# Altium PCB MRIAMP.PcbDoc (part 1 of 2)
Units mm, origin at the board's own origin, x right, y up, seen from the top; angles counter-clockwise.
Board outline 150.25 x 132.25 mm, 4 copper layers (Top Layer, Signal Layer 1, Signal Layer 2, Bottom Layer), stack 0.971 mm thick; 235 components, 124 nets, 584 pads, 101 vias.
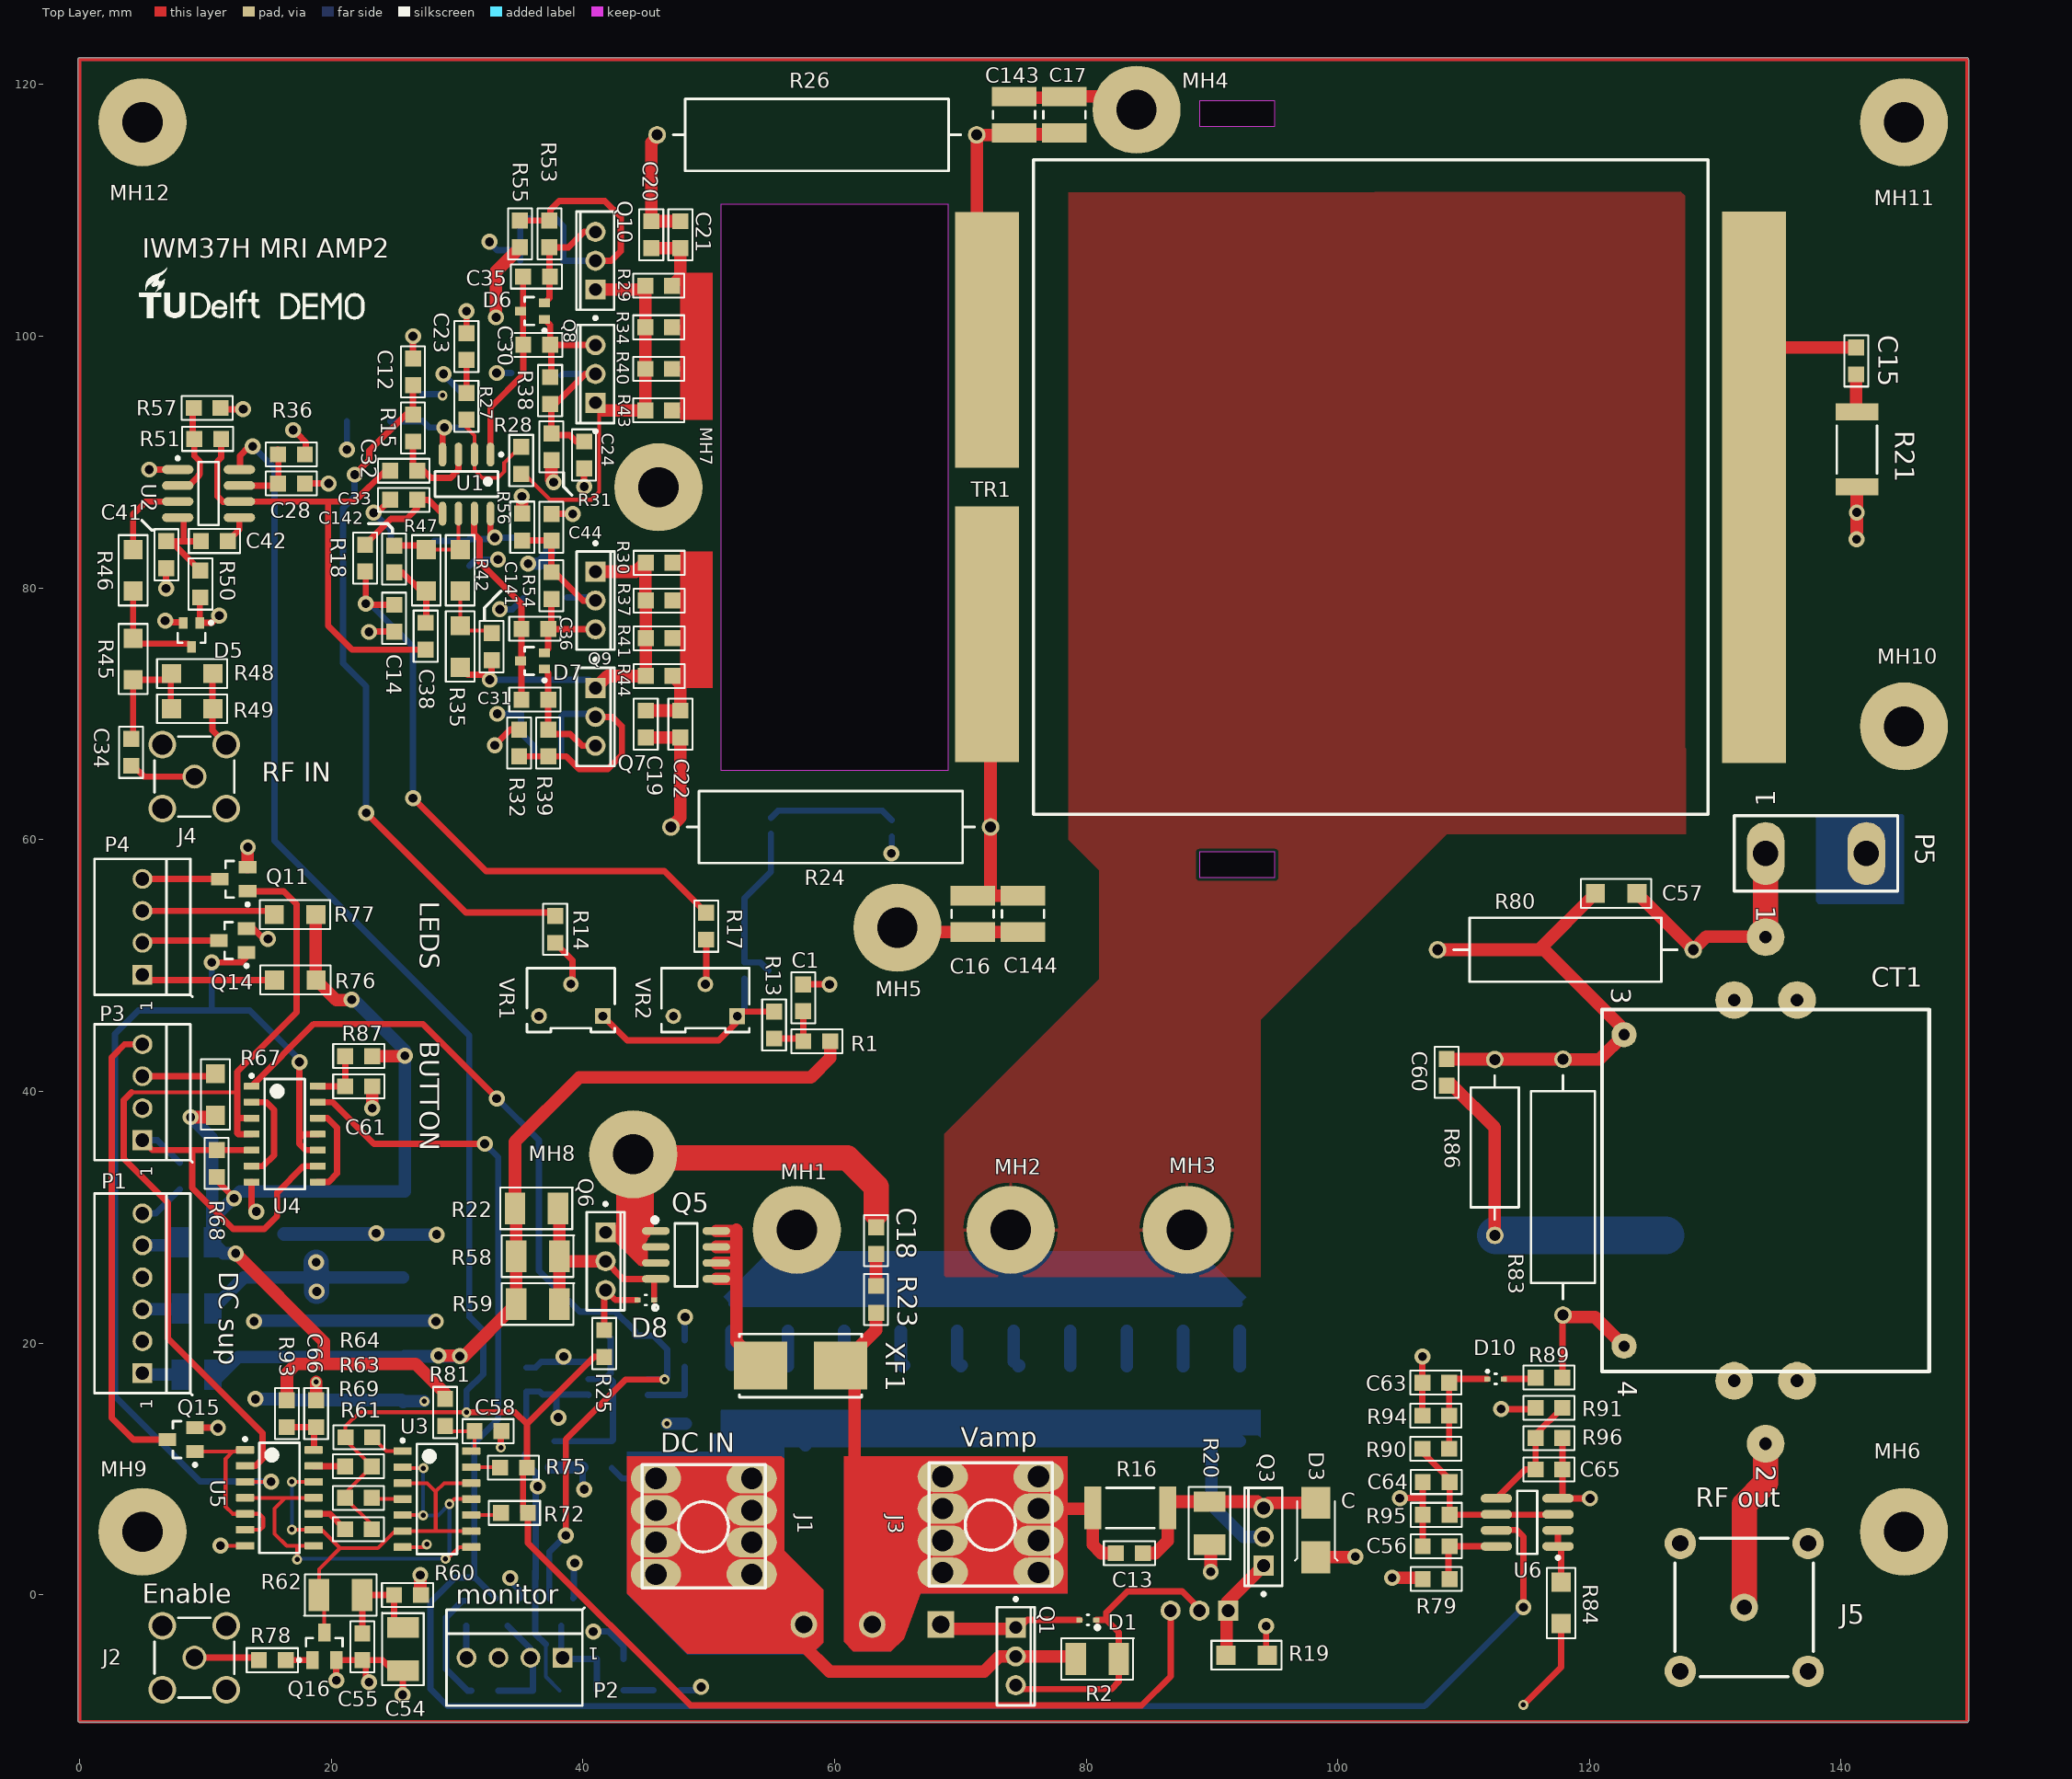
[diagram p0: Top Layer view]
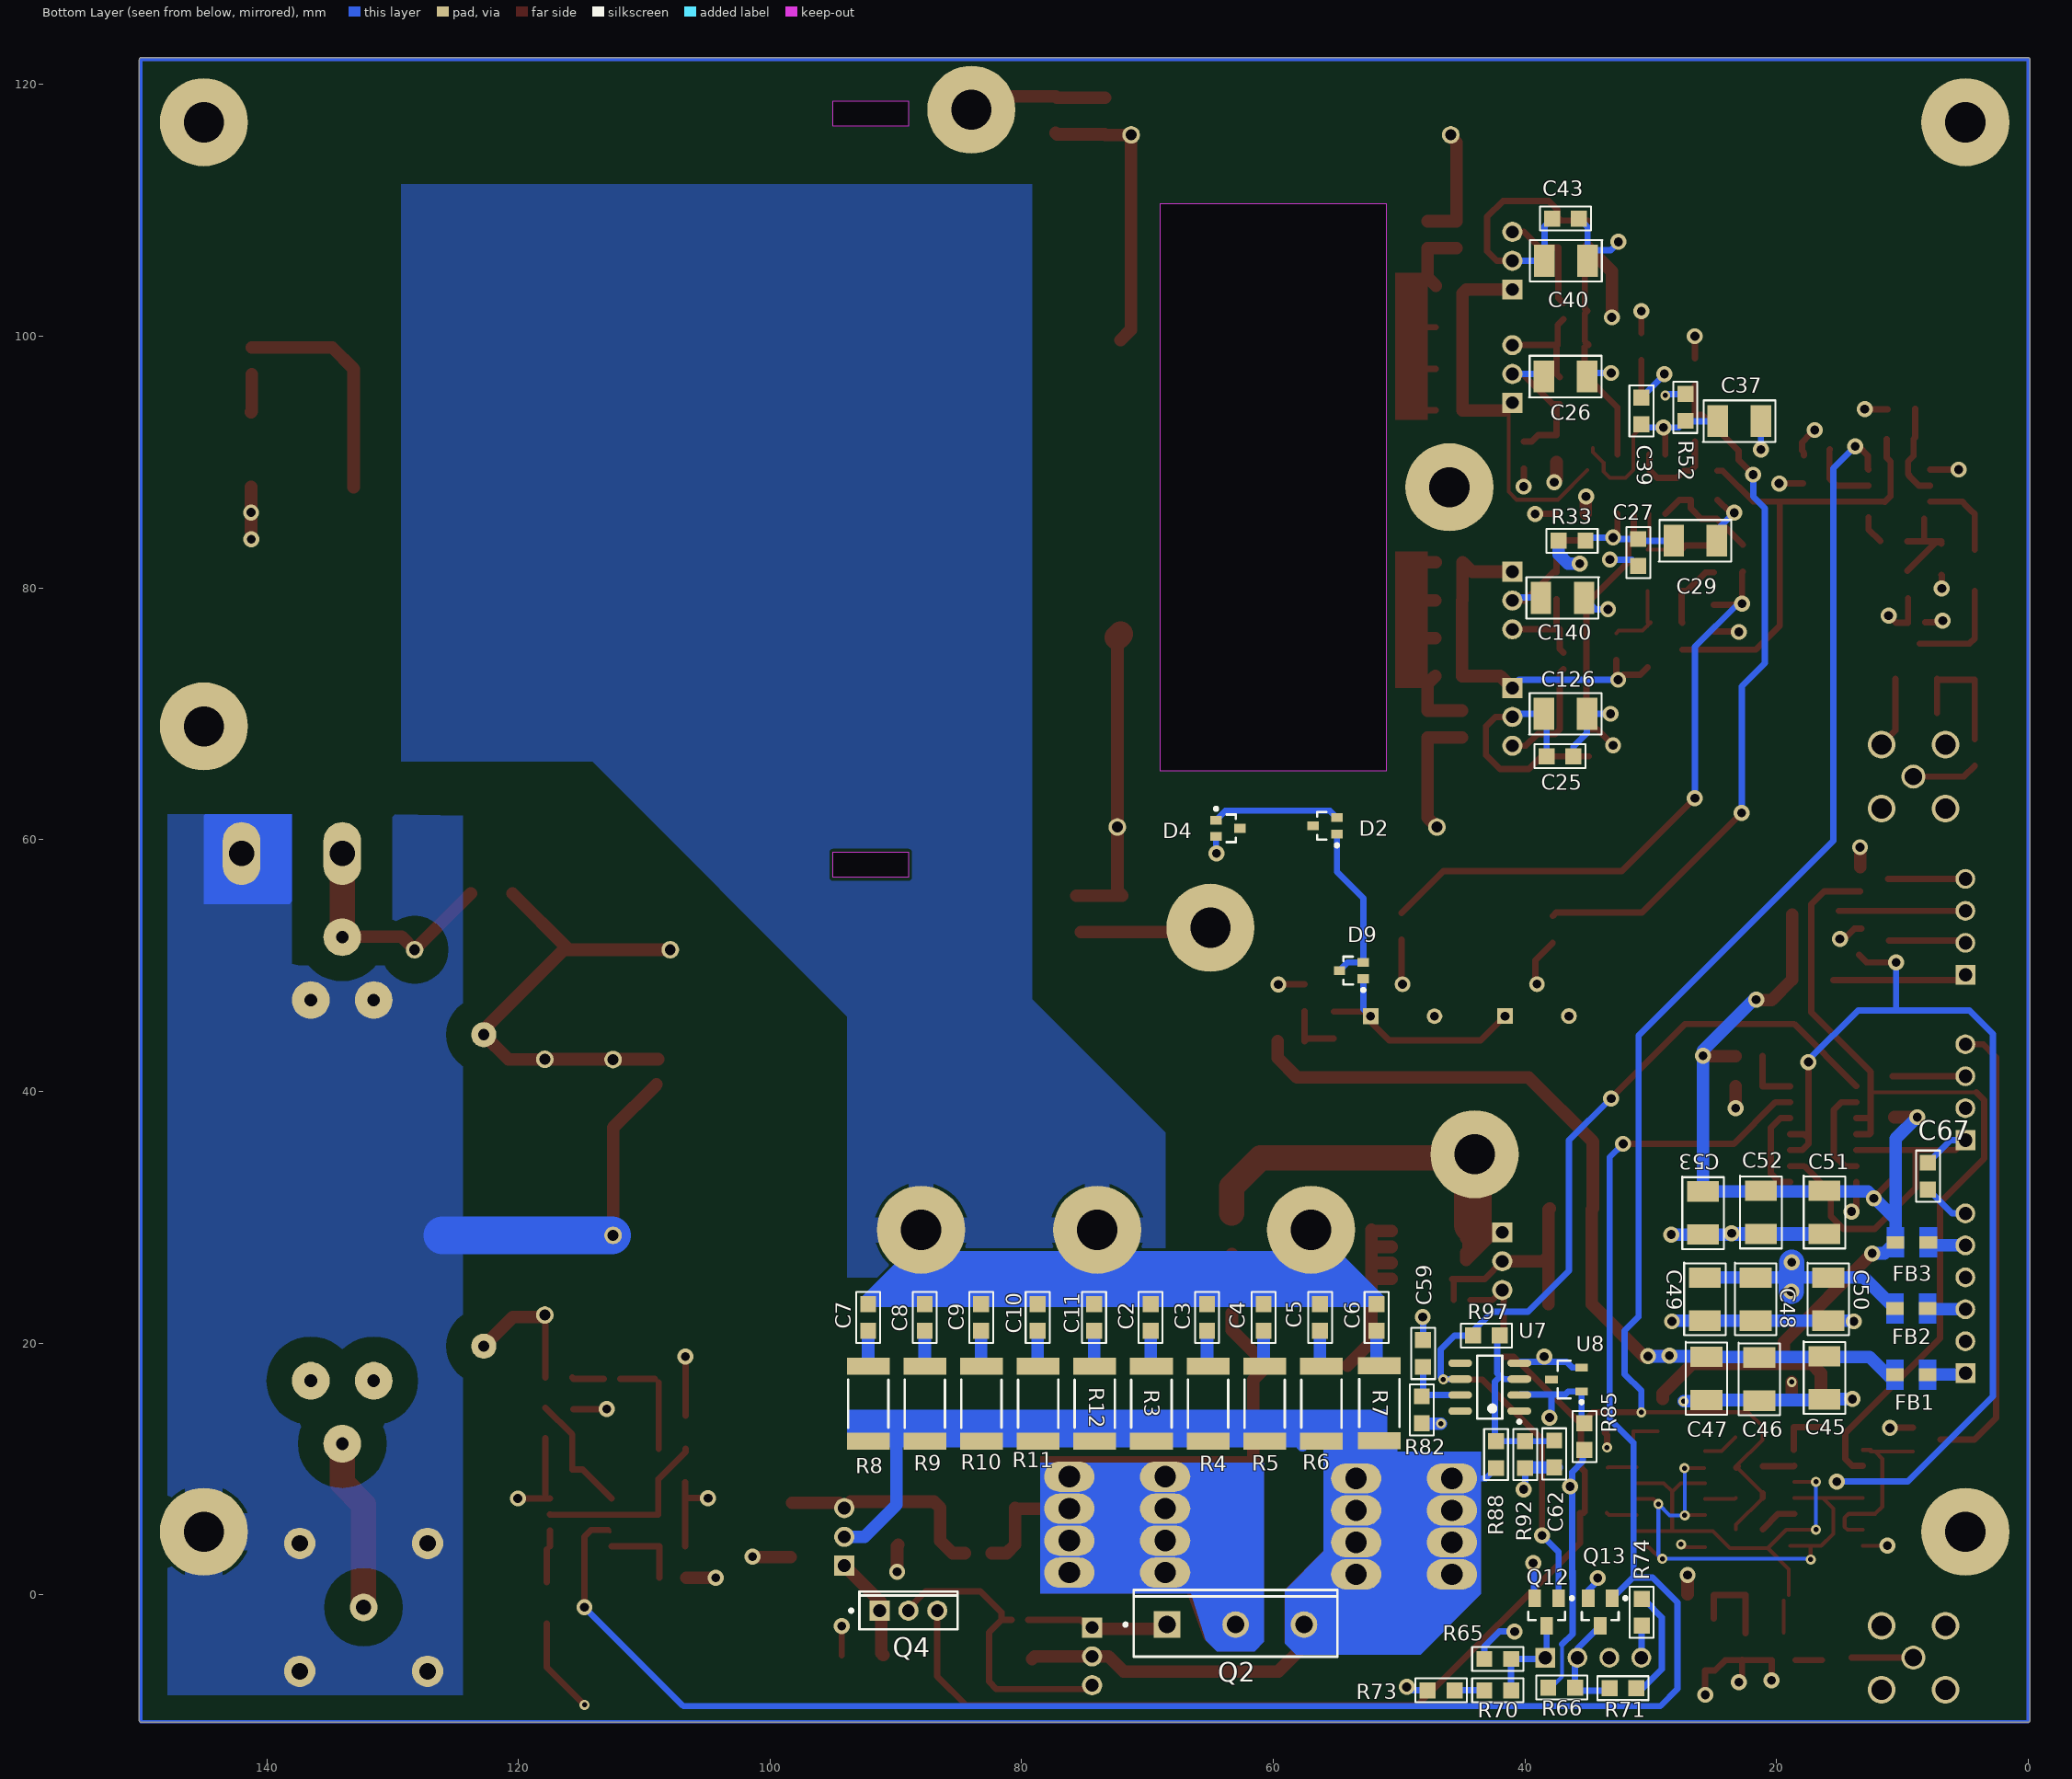
[diagram p1: Bottom Layer view, seen from below]
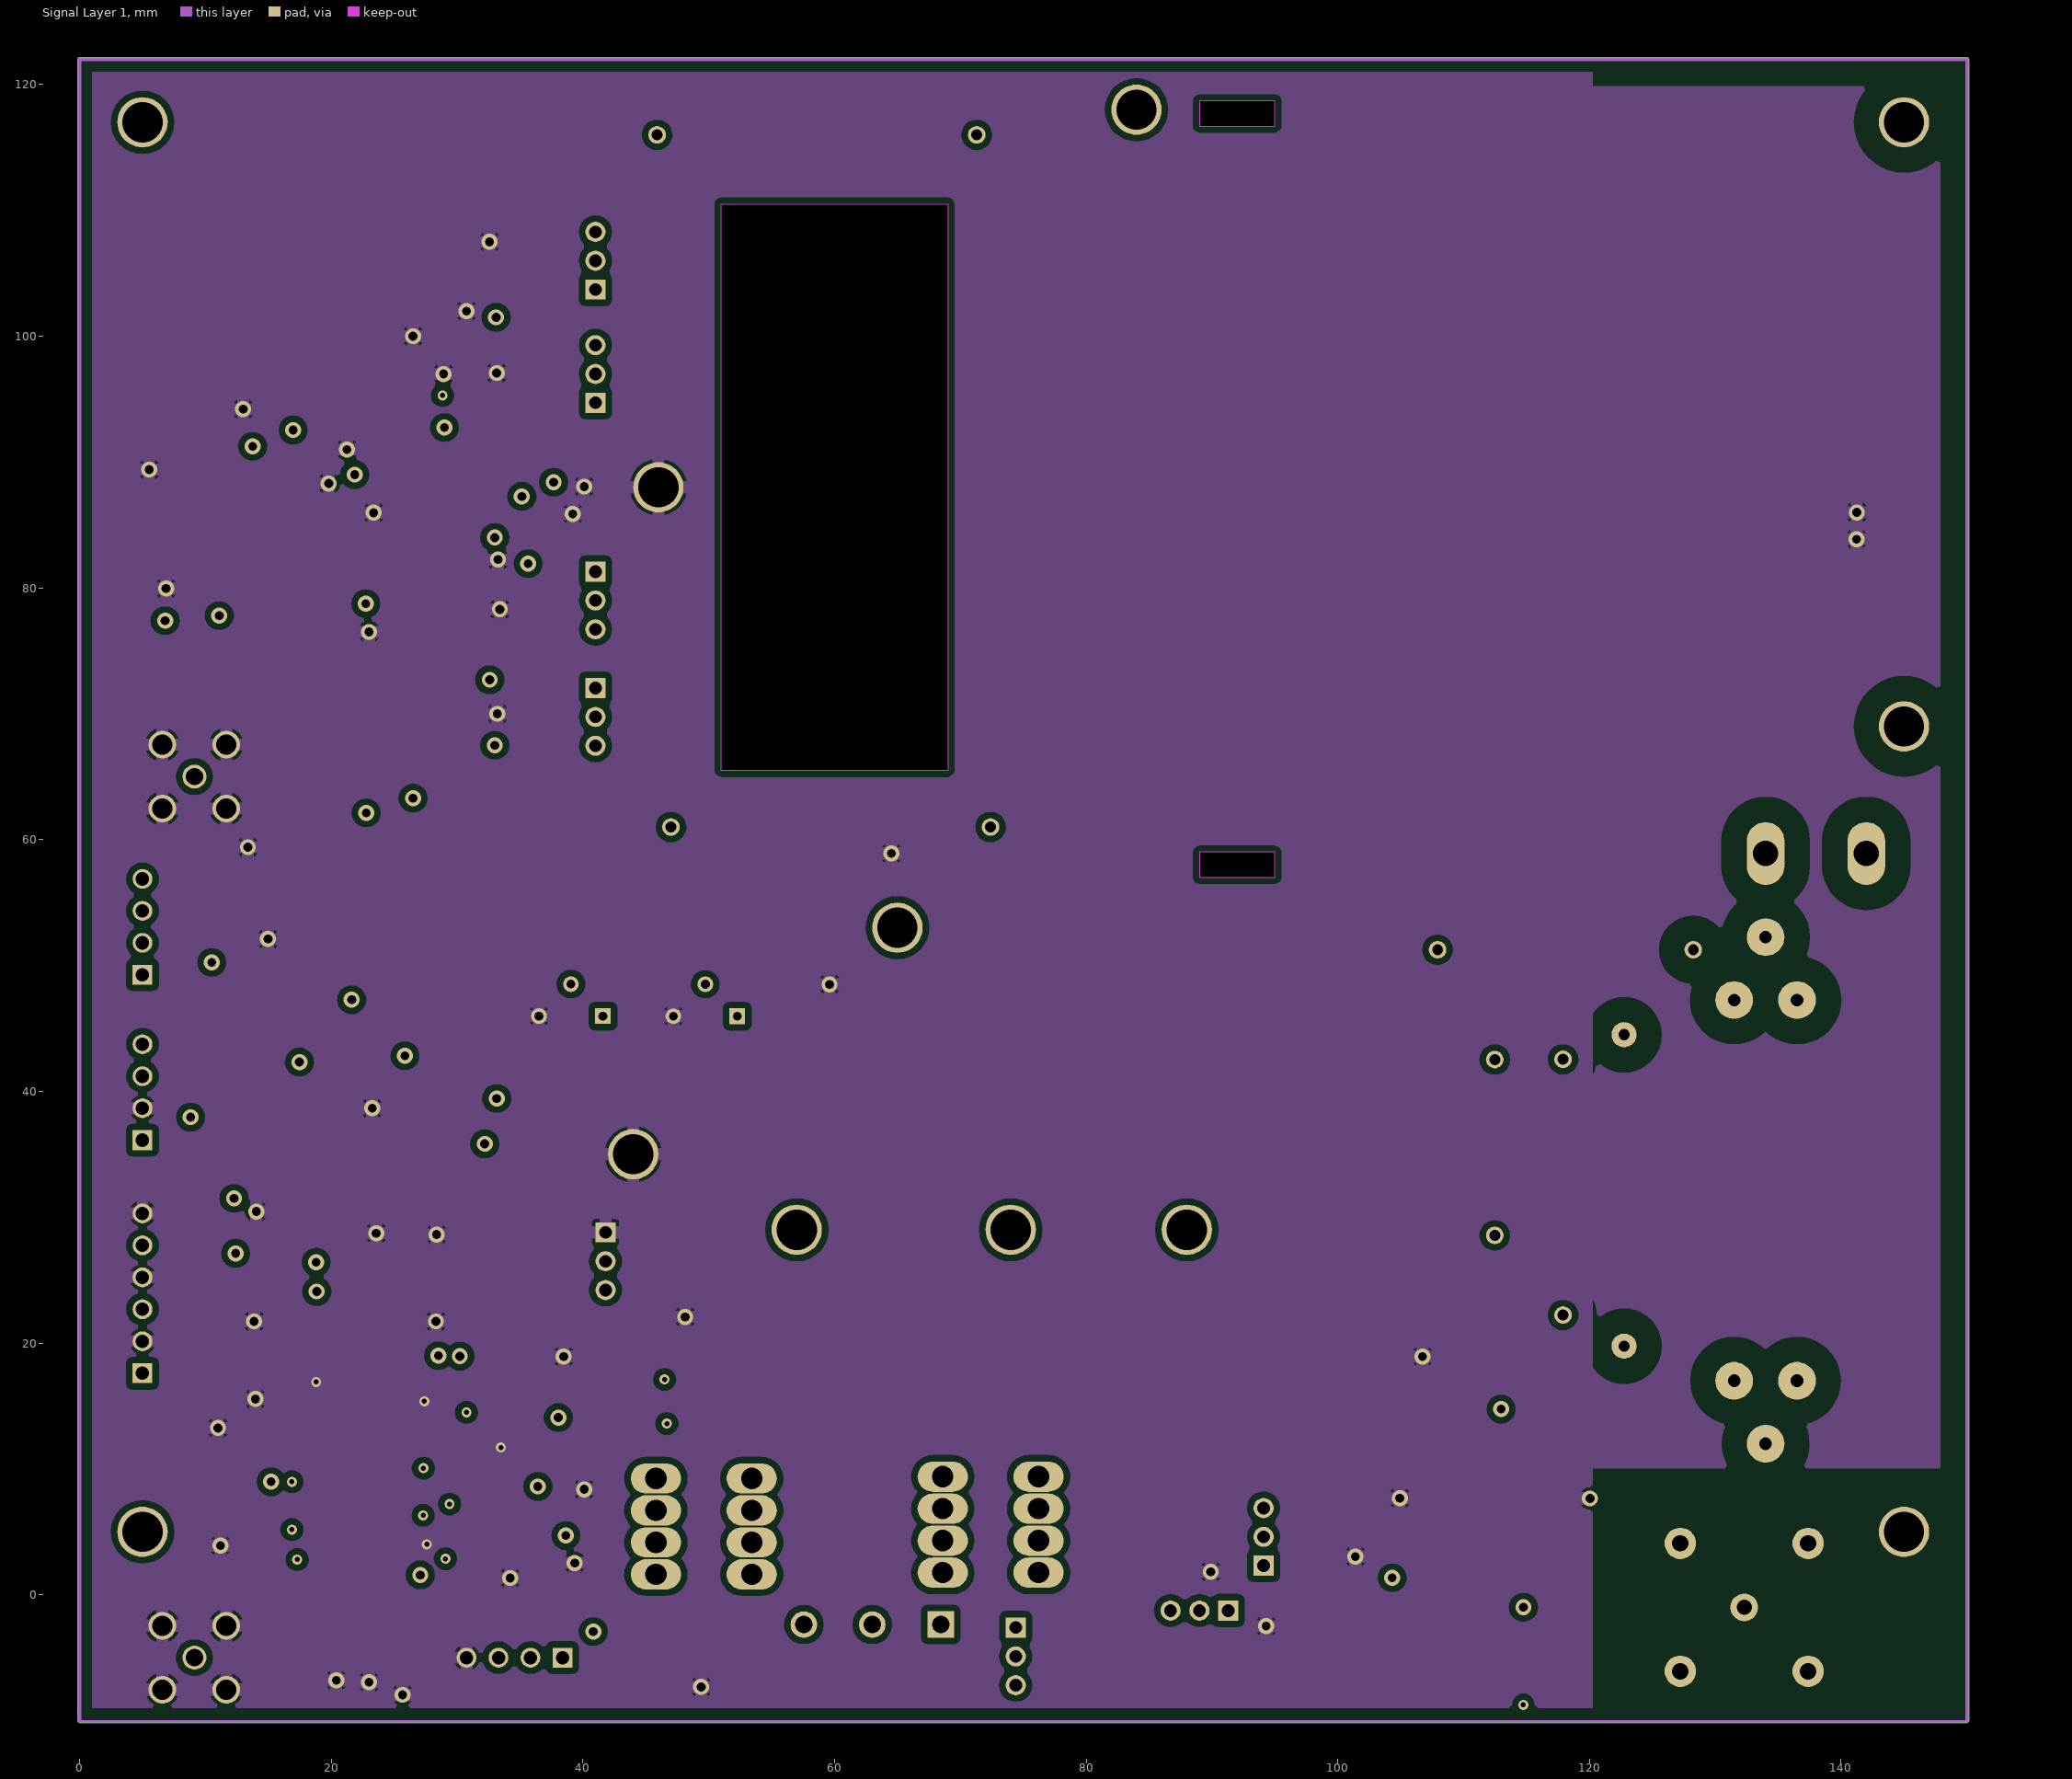
[diagram p2: Signal Layer 1]
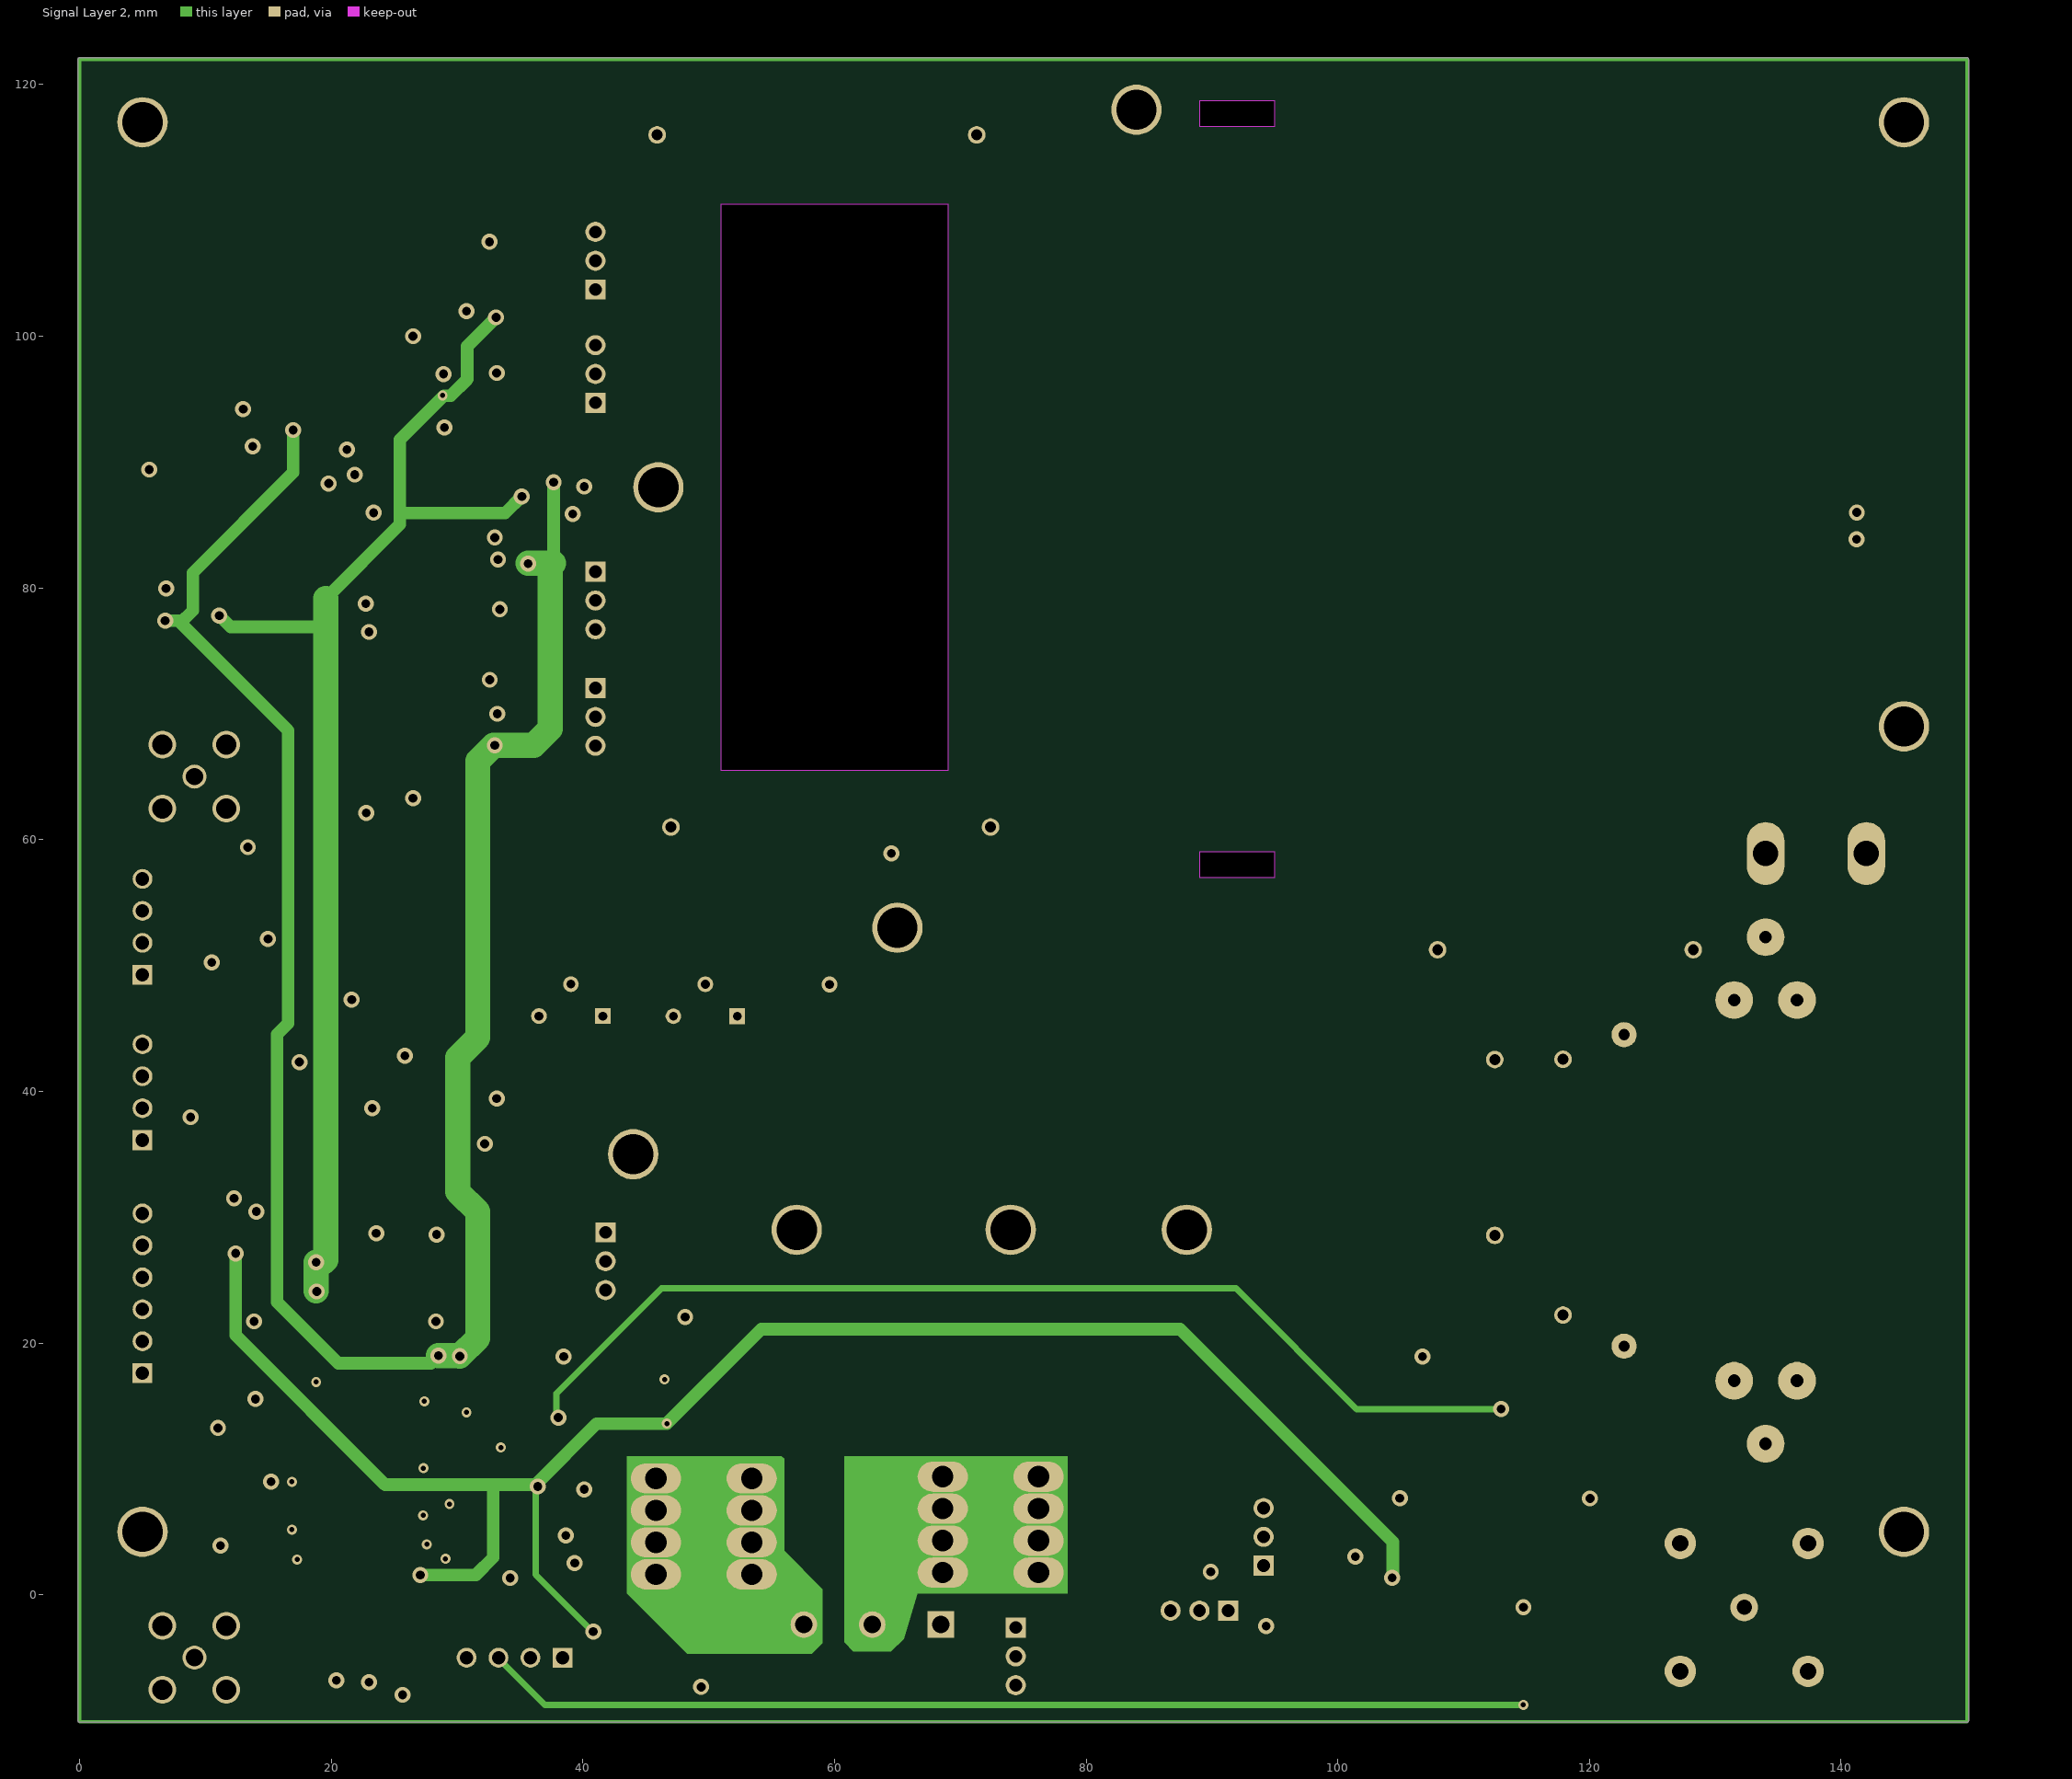
[diagram p3: Signal Layer 2]

## Layer stack, top to bottom
Top Solder: solder mask 0.0102, Solder Resist, Dk 3.5
Top Layer: signal copper 0.0356
Dielectric 1: dielectric 0.32, FR-4, Dk 4.8
Signal Layer 1: signal copper 0.036
Dielectric 2: dielectric 0.254, Dk 4.2
Signal Layer 2: signal copper 0.036
Dielectric 3: dielectric 0.254, Dk 4.2
Bottom Layer: signal copper 0.0356
Bottom Solder: solder mask 0.0102, Solder Resist, Dk 3.5

## Board outline
-0.127,-10 ccw(c0,-10) 0,-10.127 150,-10.127 ccw(c150,-10) 150.127,-10 150.127,122 ccw(c150,122) 150,122.127 0,122.127 ccw(c0,122) -0.127,122
cut-out: 51,110.5 69,110.5 69,65.5 51,65.5
cut-out: 89,116.7 95,116.7 95,118.7 89,118.7
cut-out: 89,57 95,57 95,59 89,59

## Design rules (kind name [scope] priority, off if disabled: settings)
Clearance Clearance_4 [InNamedPolygon('GND')] p1: gap=0.5 ignorepadtopadclearanceinfootprint=FALSE except(0: Arc-Hole Track-Hole SMDPad-Hole THPad-Hole Via-Hole Fill-Hole Poly-Hole Region-Hole Text-Hole)
Clearance Clearance_3 [InNamedPolygon('GND2')] p2: gap=2 ignorepadtopadclearanceinfootprint=FALSE except(0: Arc-Hole Track-Hole SMDPad-Hole THPad-Hole Via-Hole Fill-Hole Poly-Hole Region-Hole Text-Hole)
Clearance Clearance_2 [InNamedPolygon('GND2')] p3: gap=0.4 ignorepadtopadclearanceinfootprint=FALSE except(0: Arc-Hole Track-Hole SMDPad-Hole THPad-Hole Via-Hole Fill-Hole Poly-Hole Region-Hole Text-Hole)
Clearance Clearance_1 [InNamedPolygon('RFGND_L04_P010')] p4: gap=2 ignorepadtopadclearanceinfootprint=FALSE except(0: Arc-Hole Track-Hole SMDPad-Hole THPad-Hole Via-Hole Fill-Hole Poly-Hole Region-Hole Text-Hole)
Clearance [All] p5: gap=0.254 ignorepadtopadclearanceinfootprint=FALSE except(0: Arc-Hole Track-Hole SMDPad-Hole THPad-Hole Via-Hole Fill-Hole Poly-Hole Region-Hole Text-Hole)
Height [All] p1: minheight=0 maxheight=26 prefheight=12.7
HoleSize [All] p1: absolutevalues=TRUE maxlimit=6 minlimit=0.35 maxpercent=80.000 minpercent=20.000
MinimumAnnularRing [All] p1: minimumring=0.2
PlaneClearance [All] p1: clearance=1
PolygonConnect PolygonConnect_5 [All vs IsNamedPolygon('bot Layer- shield')] p1: connectstyle=Relief reliefconductorwidth=0.254 reliefentries=4 polygonreliefangle="45 Angle" airgapwidth=0.254
PolygonConnect PolygonConnect_4 [All vs IsNamedPolygon('GND')] p2: connectstyle=Relief reliefconductorwidth=1 reliefentries=4 polygonreliefangle="90 Angle" airgapwidth=0.254
PolygonConnect PolygonConnect_3 [All vs IsNamedPolygon('GND2')] p3: connectstyle=Relief reliefconductorwidth=1 reliefentries=4 polygonreliefangle="90 Angle" airgapwidth=0.254
PolygonConnect PolygonConnect_2 [All vs IsNamedPolygon('RFGND_L04_P010')] p4: connectstyle=Relief reliefconductorwidth=3 reliefentries=4 polygonreliefangle="90 Angle" airgapwidth=0.254
PolygonConnect PolygonConnect_1 [All vs IsNamedPolygon('RFGND_L04_P010')] p5: connectstyle=Relief reliefconductorwidth=1 reliefentries=4 polygonreliefangle="90 Angle" airgapwidth=0.254
PolygonConnect [All] p6: connectstyle=Relief reliefconductorwidth=0.254 reliefentries=4 polygonreliefangle="90 Angle" airgapwidth=0.254
RoutingVias [All] p1: holewidth=0.4 width=0.8 viastyle="Through Hole" minholewidth=0.4 minwidth=0.8 maxholewidth=0.711 maxwidth=1.27
SolderMaskExpansion [All] p1: expansion=0.102
Width [All] p1: maxlimit=3 minlimit=0.254 preferedwidth=0.3 minimp=50.000000 maximp=50.000000 favimp=50.000000
27 further rules are at their usual default settings.

## Classes and differential pairs
component class monitoring: C54 C55 C56 C57 C58 C59 C60 C61 C62 C63 C64 C65 C66 C67 CT1 D10 J2 J5 MH6 P2 P3 P4 P5 Q11 Q12 Q13 Q14 Q15 Q16 R60 R61 R62 R63 R64 R65 R66 R67 R68 R69 R70 R71 R72 R73 R74 R75 R76 R77 R78 R79 R80 R81 R82 R83 R84 R85 R86 R87 R88 R89 R90 R91 R92 R93 R94 R95 R96 R97 U3 U4 U5 U6 U7 U8
component class MRIAMP: C1 C2 C3 C4 C5 C6 C7 C8 C9 C10 C11 C12 C13 C14 C15 C16 C17 C18 C19 C20 C21 C22 C23 C24 C25 C26 C27 C28 C29 C30 C31 C32 C33 C34 C35 C36 C37 C38 C39 C40 C41 C42 C43 C44 C45 C46 C47 C48 C49 C50 C51 C52 C53 C126 C140 C141 C142 C143 C144 D1 D2 D3 D4 D5 D6 D7 D8 D9 FB1 FB2 FB3 J1 J3 J4 MH1 MH2 MH3 MH4 MH5 MH7 MH8 MH9 MH11 MH12 P1 Q1 Q2 Q3 Q4 Q5 Q6 Q7 Q8 Q9 Q10 R1 R2 R3 R4 R5 R6 R7 R8 R9 R10 R11 R12 R13 R14 R15 R16 R17 R18 R19 R20 R21 R22 R23 R24 R25 R26 R27 R28 R29 R30 R31 R32 R33 R34 R35 R36 R37 R38 R39 R40 R41 R42 R43 R44 R45 R46 R47 R48 R49 R50 R51 R52 R53 R54 R55 R56 R57 R58 R59 TR1 U1 U2 VR1 VR2 XF1

## Components (designator, comment, footprint, x,y, rotation, side; value= is the part's Value field where it differs from the comment)
C1 "Cap" SM/C_0805 57.512,48.5 r270 top
C2 "Cap" SM/C_0805 69.756,23.1 r270 bottom
C3 "Cap" SM/C_0805 65.267,23.1 r270 bottom
C4 "Cap" SM/C_0805 60.778,23.1 r270 bottom
C5 "Cap" SM/C_0805 56.289,23.1 r270 bottom
C6 "Cap" SM/C_0805 51.8,23.1 r270 bottom
C7 "Cap" SM/C_0805 92.2,23.1 r270 bottom
C8 "Cap" SM/C_0805 87.711,23.1 r270 bottom
C9 "Cap" SM/C_0805 83.222,23.1 r270 bottom
C10 "Cap" SM/C_0805 78.733,23.1 r270 bottom
C11 "Cap" SM/C_0805 74.244,23.1 r270 bottom
C12 "Cap" SM/C_0805 26.5,98.24 r270 top
C13 "Cap" SM/C_0805 84.5,3.3 r180 top
C14 "Cap" SM/C_0805 25,76.529 r90 top
C15 "Cap" SM/C_0805 141.2,99.1 r270 top
C16 "Cap" SMD/C_1111 70.975,54.1 r90 top
C17 "Cap" SMD/C_1111 78.27,117.6 r270 top
C18 "Cap" SM/C_0805 63.3,29.2 r270 top
C19 "Cap" SM/C_0805 45,70.25 r270 top
C20 "Cap" SM/C_0805 45.438,107 r90 top
C21 "Cap" SM/C_0805 47.75,107 r90 top
C22 "Cap" SM/C_0805 47.75,70.25 r270 top
C23 "Cap" SM/C_0805 30.75,100.25 r270 top
C24 "Cap" SM/C_0805 40.1,89.5 r90 top
C25 "Cap" SM/C_0805 36.15,66.625 r0 bottom
C26 "Cap" SM/C_1210 38.5,96.8 r180 bottom
C27 "Cap" SM/C_0805 31,81.75 r90 bottom
C28 "Cap" SM/C_0805 17.904,88.3 r180 top
C29 "Cap" SM/C_1210 28.179,83.75 r180 bottom
C30 "Cap" SM/C_0805 37.4,99.314 r180 top
C31 "Cap" SM/C_0805 37.25,71.12 r180 top
C32 "Cap" SM/C_0805 26.829,89.312 r180 top
C33 "Cap" SM/C_0805 26.829,87 r180 top
C34 "Cap" SM/C_0805 4.1,68 r270 top
C35 "Cap" SM/C_0805 37.384,104.737 r180 top
C36 "Cap" SM/C_0805 37.25,76.75 r180 top
C37 "Cap" SM/C_1210 24.679,93.25 r180 bottom
C38 "Cap" SM/C_0805 27.5,75.102 r90 top
C39 "Cap" SM/C_0805 30.75,93 r90 bottom
C40 "Cap" SM/C_1210 35.025,106 r0 bottom
C41 "Cap" SM/C_0805 6.9,81.575 r90 top
C42 "Cap" SM/C_0805 11.775,83.725 r180 top
C43 "Cap" SM/C_0805 37.85,109.35 r180 bottom
C44 "Cap" SM/C_0805 37.5,83.75 r90 top
C45 "Cap" SM/C_1210 16.2,18.95 r270 bottom
C46 "Cap" SM/C_1210 21.375,18.85 r270 bottom
C47 "Cap" SM/C_1210 25.575,18.9 r270 bottom
C48 "Cap" SM/C_1210 21.675,25.2 r270 bottom
C49 "Cap" SM/C_1210 25.7,25.2 r270 bottom
C50 "Cap" SM/C_1210 15.9,25.2 r270 bottom
C51 "Cap" SM/C_1210 16.2,32.1 r270 bottom
C52 "Cap" SM/C_1210 21.25,32.1 r270 bottom
C53 "Cap" SM/C_1210 25.85,32.05 r270 bottom
C54 "Cap" SM/C_1210 25.7,-2.6 r270 top
C55 "Cap" SM/C_0805 22.475,-5.2 r90 top
C56 "Cap" SM/C_0805 106.75,3.85 r0 top
C57 "Cap" SM/C_1206 120.475,55.725 r0 top
C58 "Cap" SM/C_0805 33.525,13 r180 top
C59 "Cap" SM/C_0805 48.1,20.234 r270 bottom
C60 "Cap" SM/C_0805 108.65,40.45 r90 top
C61 "Cap" SM/C_0805 23.25,40.4 r180 top
C62 "Cap" SM/C_0805 37.675,10.125 r90 bottom
C63 "Cap" SM/C_0805 106.716,16.85 r0 top
C64 "Cap" SM/C_0805 106.75,8.95 r0 top
C65 "Cap" SM/C_0805 117.85,9.95 r180 top
C66 "Cap" SM/C_0805 18.8,15.45 r270 top
C67 "Cap" SM/C_0805 7.975,32.2 r90 bottom
C126 "Cap" SM/C_1210 38.5,70 r180 bottom
C140 "Cap" SM/C_1210 35.3,79.2 r0 bottom
C141 "Cap" SM/C_0805 32.752,74.266 r90 top
C142 "Cap" SM/C_0805 25,83.367 r270 top
C143 "Cap" SMD/C_1111 74.262,117.6 r270 top
C144 "Cap" SMD/C_1111 74.983,54.1 r90 top
CT1 "CT1:10" CT 134,32 r180 top
D1 "BAT54XV2T5G" ONSC-SOD-523-2-502-01_V 80.14,-2 r180 top
D2 "BAV99WT1G" ONSC-SOT-323-3-419-04_V 55.9,61.1 r0 bottom
D3 "ES1C" SM/DO214AC_12 98.255,2.982 r90 top
D4 "BAV99WT1G" ONSC-SOT-323-3-419-04_V 63.6,60.9 r180 bottom
D5 "BAV99WT1G" ONSC-SOT-323-3-419-04_V 8.9,76.275 r270 top
D6 "BAV99WT1G" ONSC-SOT-323-3-419-04_V 36,102 r180 top
D7 "BAV99WT1G" ONSC-SOT-323-3-419-04_V 36,74.203 r180 top
D8 "BAT54XV2T5G" ONSC-SOD-523-2-502-01_V 45,23.421 r180 top
D9 "BAV99WT1G" ONSC-SOT-323-3-419-04_V 53.8,49.6 r0 bottom
D10 "BAT54XV2T5G" ONSC-SOD-523-2-502-01_V 112.55,17.15 r0 top
FB1 "BLM21PG300SN1B" MURA-BLM21-B40-CHIP-2_V1 9.3,17.475 r0 bottom
FB2 "BLM21PG300SN1B" MURA-BLM21-B40-CHIP-2_V1 9.3,22.75 r0 bottom
FB3 "BLM21PG300SN1B" MURA-BLM21-B40-CHIP-2_V1 9.25,28 r0 bottom
"IWM37H MRI AMP2" "Comment" LOGO3 4.75,101.275 r0 top
J1 "M4 bushing" BUSHING_M4 45.8,9.24 r0 top
J2 "CONSMA008" SMA-Grotere-Gaten 9.127,-5 r90 top
J3 "M4 bushing" BUSHING_M4 68.6,9.38 r0 top
J4 "CONSMA008" SMA-Grotere-Gaten 9.127,65.011 r0 top
J5 "R141426161" BNC_Danny 132.3,-1 r180 top
MH1 "M3spacer" MTHOLE3.2MM_TOPBOT7MM#1 57.1,31.1 r0 top
MH2 "M3spacer" MTHOLE3.2MM_TOPBOT7MM#2 73.257,30.9 r0 top
MH3 "M3spacer" MTHOLE3.2MM_TOPBOT7MM#3 88.9,30.9 r0 top
MH4 "M3spacer" MTHOLE3.2MM_TOPBOT7MM#4 83.693,117.983 r0 top
MH5 "M3spacer" MTHOLE3.2MM_TOPBOT7MM#5 65,53 r90 top
MH6 "M3spacer" MTHOLE3.2MM_TOPBOT7MM#6 144.606,-0.548 r90 top
MH7 "M3spacer" MTHOLE3.2MM_TOPBOT7MM#5 46,88 r0 top
MH8 "M3spacer" MTHOLE3.2MM_TOPBOT7MM#7 44.6,38.656 r90 top
MH9 "M3spacer" MTHOLE3.2MM_TOPBOT7MM#5 5,5 r90 top
MH10 "M3spacer" MTHOLE3.2MM_TOPBOT7MM#8 155.734,-4.949 r90 top
MH11 "M3spacer" MTHOLE3.2MM_TOPBOT7MM#5 145,117 r90 top
MH12 "M3spacer" MTHOLE3.2MM_TOPBOT7MM#5 5,117 r90 top
P1 "Header 6" POLCON.100/VH/TM1SQS/W.300/6 5,17.6 r90 top
P2 "HEADER 4" POLCON.100/VH/TM1SQS/W.300/4 38.375,-5 r180 top
P3 "HEADER 4" POLCON.100/VH/TM1SQS/W.300/4 5,36.12 r90 top
P4 "HEADER 4" POLCON.100/VH/TM1SQS/W.300/4 5,49.26 r90 top
P5 "RFin" megaheader 138,58.9 r90 top
Q1 "BD139" ONSC-TO-225-3-77-09 74.4,-4.9 r0 top
Q2 "IXTH90P10P" INF-PG-TO247-3-44 63,-2.37 r90 bottom
Q3 "BD139" ONSC-TO-225-3-77-09 94.1,4.6 r180 top
Q4 "BD139" ONSC-TO-225-3-77-09 89,-1.26 r90 bottom
Q5 "BSC340N08NS3" SO8_N 48.2,27 r0 top
Q6 "BD139" ONSC-TO-225-3-77-09 41.8,26.5 r0 top
Q7 "BD139" ONSC-TO-225-3-77-09 41,69.75 r0 top
Q8 "BD139" ONSC-TO-225-3-77-09 41,97 r180 top
Q9 "BD140" ONSC-TO-225-3-77-09 41,79 r0 top
Q10 "BD140" ONSC-TO-225-3-77-09 41,106 r180 top
Q11 "FDV301N" FAIR-SOT23-3_V 12.25,56.85 r90 top
Q12 "FDV301N" FAIR-SOT23-3_V 38.275,-1.375 r0 bottom
Q13 "FDV301N" FAIR-SOT23-3_V 34.025,-1.375 r0 bottom
Q14 "FDV301N" FAIR-SOT23-3_V 12.175,51.975 r90 top
Q15 "FDV301N" FAIR-SOT23-3_V 8.075,12.325 r90 top
Q16 "FDV301N" FAIR-SOT23-3_V 19.45,-4.1 r0 top
R1 "Res2" SM/R_0805 57.524,43.976 r0 top
R2 "Res2" SM/R_1210 82.6,-5.1 r180 top
R3 "Res2" SMD/R_2512 69.691,15.177 r270 bottom
R4 "Res2" SMD/R_2512 65.189,15.177 r270 bottom
R5 "Res2" SMD/R_2512 60.687,15.177 r270 bottom
R6 "Res2" SMD/R_2512 56.185,15.177 r270 bottom
R7 "Res2" SMD/R_2512 51.575,15.225 r270 bottom
R8 "Res2" SMD/R_2512 92.2,15.177 r270 bottom
R9 "Res2" SMD/R_2512 87.698,15.177 r270 bottom
R10 "Res2" SMD/R_2512 83.196,15.177 r270 bottom
R11 "Res2" SMD/R_2512 78.694,15.177 r270 bottom
R12 "Res2" SMD/R_2512 74.192,15.177 r270 bottom
R13 "Res2" SM/R_0805 55.2,46.334 r270 top
R14 "Res2" SM/R_0805 37.8,53.934 r270 top
R15 "Res2" SM/R_0805 26.5,91.636 r90 top
R16 "Res2" SMD/R_2512 83.5,6.9 r0 top
R17 "Res2" SM/R_0805 49.8,54.184 r270 top
R18 "Res2" SM/R_0805 22.688,83.434 r270 top
R19 "Res2" SM/R_1206 94.4,-4.8 r180 top
R20 "Res2" SM/R_1210 89.8,3.971 r90 top
R21 "Res2" SMD/R_2512 141.25,91 r270 top
R22 "Res2" SM/R_1210 38.029,30.7 r180 top
R23 "Res2" SM/R_0805 63.3,24.534 r270 top
R24 "Res2" AX/1.000X.225/.034 47,61 r0 top
R25 "Res2" SM/R_0805 41.7,21.029 r270 top
R26 "Res2" AX/1.000X.225/.034 45.9,116 r0 top
R27 "Res2" SM/R_0805 30.75,95.5 r270 top
R28 "Res2" SM/R_0805 35.1,91.2 r270 top
R29 "Res2" SM/R_0805 44.958,104.013 r0 top
R30 "Res2" SM/R_0805 45,82 r0 top
R31 "Res2" SM/R_0805 37.5,92.275 r270 top
R32 "Res2" SM/R_0805 34.938,68.75 r270 top
R33 "Res2" SM/R_0805 35.188,83.75 r0 bottom
R34 "Res2" SM/R_0805 44.958,100.711 r0 top
R35 "Res2" SM/C_1206 30.25,73.698 r90 top
R36 "Res2" SM/R_0805 15.771,90.612 r0 top
R37 "Res2" SM/R_0805 45,79 r0 top
R38 "Res2" SM/R_0805 37.4,94.616 r90 top
R39 "Res2" SM/R_0805 37.25,66.616 r90 top
R40 "Res2" SM/R_0805 44.958,97.409 r0 top
R41 "Res2" SM/R_0805 45,76 r0 top
R42 "Res2" SM/C_1206 30.25,79.75 r90 top
R43 "Res2" SM/R_0805 44.958,94.107 r0 top
R44 "Res2" SM/R_0805 45,73 r0 top
R45 "Res2" SM/C_1206 4.25,76 r270 top
R46 "Res2" SM/C_1206 4.25,83.052 r270 top
R47 "Res2" SM/C_1206 27.557,83.052 r270 top
R48 "Res2" SM/C_1206 10.6,73.2 r180 top
R49 "Res2" SM/C_1206 10.6,70.4 r180 top
R50 "Res2" SM/R_0805 9.6,81.375 r270 top
R51 "Res2" SM/R_0805 9.116,91.838 r0 top
R52 "Res2" SM/R_0805 27.25,93.273 r90 bottom
R53 "Res2" SM/R_0805 37.338,107.061 r90 top
R54 "Res2" SM/R_0805 37.5,79.116 r90 top
R55 "Res2" SM/R_0805 35,109.195 r270 top
R56 "Res2" SM/R_0805 35.175,85.9 r270 top
R57 "Res2" SM/R_0805 11.2,94.3 r180 top
R58 "Res2" SM/R_1210 38.129,26.9 r180 top
R59 "Res2" SM/R_1210 38.129,23.1 r180 top
R60 "Res2" SM/R_0805 27.125,-0.025 r180 top
R61 "Res2" SM/R_0805 21.1,5.2 r0 top
R62 "Res2" SM/R_1210 19.025,-0.025 r0 top
R63 "Res2" SM/R_0805 21.1,10.2 r0 top
R64 "Res2" SM/R_0805 23.266,12.512 r180 top
R65 "Res2" SM/R_0805 43.234,-5.1 r180 bottom
R66 "Res2" SM/R_0805 38.15,-7.375 r180 bottom
R67 "Res2" SM/C_1206 10.8,38.1 r90 top
R68 "Res2" SM/R_0805 10.9,33.2 r90 top
R69 "Res2" SM/R_0805 23.234,7.7 r180 top
R70 "Res2" SM/R_0805 41.1,-7.6 r0 bottom
R71 "Res2" SM/R_0805 33.275,-7.425 r180 bottom
R72 "Res2" SM/R_0805 33.5,6.5 r0 top
R73 "Res2" SM/R_0805 45.6,-7.6 r0 bottom
R74 "Res2" SM/R_0805 30.725,-0.325 r270 bottom
R75 "Res2" SM/R_0805 33.421,10.1 r0 top
R76 "Res2" SM/C_1206 18.8,48.85 r180 top
R77 "Res2" SM/C_1206 18.775,54.05 r180 top
R78 "Res2" SM/R_0805 14.25,-5.2 r0 top
R79 "Res2" SM/R_0805 106.75,1.25 r0 top
R80 "Res2" AX/.800X.200/.037 128.25,51.25 r180 top
R81 "Res2" SM/R_0805 29.05,15.55 r270 top
R82 "Res2" SM/R_0805 48.2,13.629 r90 bottom
R83 "Res2" AX/.800X.200/.037 117.9,22.225 r90 top
R84 "Res2" SM/C_1206 117.75,-2.302 r90 top
R85 "Res2" SM/R_0805 35.275,11.5 r90 bottom
R86 "Res2" AX/.550X.150/.034 112.475,42.525 r270 top
R87 "Res2" SM/R_0805 23.25,42.8 r180 top
R88 "Res2" SM/R_0805 42.3,10.066 r90 bottom
R89 "Res2" SM/R_0805 117.85,17.25 r180 top
R90 "Res2" SM/R_0805 108.85,11.6 r180 top
R91 "Res2" SM/R_0805 115.716,14.85 r0 top
R92 "Res2" SM/R_0805 39.988,12.199 r270 bottom
R93 "Res2" SM/R_0805 16.475,15.45 r270 top
R94 "Res2" SM/R_0805 108.85,14.225 r180 top
R95 "Res2" SM/R_0805 106.75,6.35 r0 top
R96 "Res2" SM/R_0805 117.85,12.45 r180 top
R97 "Res2" SM/R_0805 42,20.6 r0 bottom
TR1 "1:1:4:4" PCBComponent_1 72.136,88.011 r270 top
U1 "AD8017ARZ" ADI-R-8_L 30.75,88.25 r270 top
U2 "AD8021ARZ" ADI-R-8_M 10.25,87.5 r0 top
U3 "SN74HC02D" D0014A_N 28.4,7.6 r0 top
U4 "SN74AHCT132D" D0014A_L 16.3,36.6 r0 top
U5 "SN74HC02D" D0014A_N 15.879,7.7 r0 top
U6 "AD822ARZ" ADI-R-8_M 115.05,5.75 r180 top
U7 "AD820ARZ" ADI-R-8_L 42.8,16.5 r0 bottom
U8 "LM4040CIM3-2.5" DBZ0003A_N 36.7,17.1 r0 bottom
VR1 "10k" VRES38 41.59,45.978 r180 top
VR2 "10k" VRES38 52.272,45.968 r180 top
XF1 "0154010.DR" LFUS-154_V 57.3,18.2 r0 top

## Footprints (in the part's own frame and the unit in brackets; to place one, negate y for a bottom-side part, rotate by r counter-clockwise, add the part's x,y. Pads: shape width x height; smd on the part's side, far side on the other; paste and mask are expansions set on the pad)
ADI-R-8_L [mm] "SOIC, 8-Leads, Body 4.9x3.9mm, Pitch 1.27mm, IPC High Density"
  oval 1.9x0.6 smd: 1(-2.35,1.905) 2(-2.35,0.635) 3(-2.35,-0.635) 4(-2.35,-1.905) 5(2.35,-1.905) 6(2.35,-0.635) 7(2.35,0.635) 8(2.35,1.905)
  silkscreen extent -2.47,-2.5 1,2.88, body extent -2,-2.5 2,2.5, height 1.75
ADI-R-8_M [mm] "SOIC, 8-Leads, Body 4.9x3.9mm, Pitch 1.27mm, IPC Low Density"
  oval 2.5x0.7 smd: 1(-2.45,1.905) 2(-2.45,0.635) 3(-2.45,-0.635) 4(-2.45,-1.905) 5(2.45,-1.905) 6(2.45,-0.635) 7(2.45,0.635) 8(2.45,1.905)
  silkscreen extent -2.57,-2.5 0.8,2.93, body extent -2,-2.5 2,2.5, height 1.75
AX/1.000X.225/.034 [mil]
  round 55 hole 34: 1(0,0) 2(1000,0)
  silkscreen extent 50,-112 950,112
AX/.550X.150/.034 [mil]
  round 55 hole 34: 1(0,0) 2(550,0)
  silkscreen extent 50,-75 500,75
AX/.800X.200/.037 [mil]
  round 55 hole 34: 1(0,0) 2(800,0)
  silkscreen extent 50,-100 750,100
BNC_Danny [mm]
  round 2.2 hole 1.2: 1(0,0)
  round 2.499 hole 1.3: 2(-5.08,-5.08) 3(5.08,-5.08) 4(5.08,5.08) 5(-5.08,5.08)
  silkscreen extent -5.5,-5.5 5.5,5.5
BUSHING_M4 [mm]
  oval 4x2.4 hole 1.7: 1(0,0) 2(0,-2.54) 3(0,-5.08) 4(0,-7.62) 5(7.62,-7.62) 6(7.62,-5.08) 7(7.62,-2.54) 8(7.62,0)
  silkscreen extent -1.1,-8.7 8.7,1.1
CT [mm]
  round 3 hole 1: 1(0,-20.25) 2(0,20) 5(-2.5,-15.25) 6(2.5,-15.25) 7(-2.5,15) 8(2.5,15)
  round 2 hole 0.9: 3(11.25,-12.5) 4(11.25,12.25)
  silkscreen extent -13,-14.5 13,14.25
D0014A_L [mm] "SOIC, 14-Leads, Body 8.75x4mm, Pitch 1.27mm, IPC High Density"
  rrect18% 1.25x0.55 smd: 1(-2.625,3.81) 2(-2.625,2.54) 3(-2.625,1.27) 4(-2.625,0) 5(-2.625,-1.27) 6(-2.625,-2.54) 7(-2.625,-3.81) 8(2.625,-3.81) 9(2.625,-2.54) 10(2.625,-1.27) 11(2.625,0) 12(2.625,1.27) 13(2.625,2.54) 14(2.625,3.81)
  silkscreen extent -2.75,-4.38 1.6,4.76, body extent -3.02,-4.32 3.02,4.32, height 1.59
D0014A_N [mm] "SOIC, 14-Leads, Body 8.75x4mm, Pitch 1.27mm, IPC Medium Density"
  rrect17% 1.45x0.6 smd: 1(-2.725,3.81) 2(-2.725,2.54) 3(-2.725,1.27) 4(-2.725,0) 5(-2.725,-1.27) 6(-2.725,-2.54) 7(-2.725,-3.81) 8(2.725,-3.81) 9(2.725,-2.54) 10(2.725,-1.27) 11(2.725,0) 12(2.725,1.27) 13(2.725,2.54) 14(2.725,3.81)
  silkscreen extent -2.85,-4.38 1.6,4.78, body extent -3.02,-4.32 3.02,4.32, height 1.59
DBZ0003A_N [mm] "SOT23, 3-Leads, Body 3.04x1.4mm, Pitch 0.95mm, IPC Medium Density"
  rect 1x0.6 smd: 1(-1.2,0.95) 2(-1.2,-0.95) 3(1.2,0)
  silkscreen extent -1.32,-1.5 0.7,1.92, body extent -1.26,-1.46 1.26,1.46, height 0.96
FAIR-SOT23-3_V [mm] "SOT23, 3-Leads, Body 2.92x1.3mm, Pitch 0.95mm"
  rect 1x1.4 smd: 1(-0.95,-1.1) 2(0.95,-1.1) 3(0,1.1)
  silkscreen extent -2.12,-1.23 1.46,0.65, body extent -1.46,-0.65 1.46,0.65, height 1.2
INF-PG-TO247-3-44 [mm] "FM, 3-Leads, Body 5.02x15.94mm, Pitch 5.44mm"
  rect 2.1x2.1 hole 1.4: 1(0,5.44)
  round 2.1 hole 1.4: 2(0,0) 3(0,-5.44)
  silkscreen extent -2.56,-8.1 2.75,8.88, body extent -2.53,-8.08 2.72,8.08, height 25.5
LFUS-154_V [mm] "SMD, 2-Leads, Body 9.73x5.03mm"
  rect 4.24x3.81 smd: 1(-3.185,0) 2(3.185,0)
  silkscreen extent -4.86,-2.51 4.86,2.51, body extent -4.86,-2.51 4.86,2.51, height 3.81
LOGO3 [mm]
  silkscreen extent 0,0.05 17.87,4.18
megaheader [mm]
  oval 5x3 hole 2: 1(0,4) 2(0,-4)
  silkscreen extent -3,-6.5 3,6.5
MTHOLE3.2MM_TOPBOT7MM#1 [mm]
  round 6.999 / inner round 4 / far side round 6.999 hole 3.2: 1(-0.1,-2.1)
MTHOLE3.2MM_TOPBOT7MM#2 [mm]
  round 6.999 / inner round 4 / far side round 6.999 hole 3.2: 1(0.743,-1.9)
MTHOLE3.2MM_TOPBOT7MM#3 [mm]
  round 6.999 / inner round 4 / far side round 6.999 hole 3.2: 1(-0.9,-1.9)
MTHOLE3.2MM_TOPBOT7MM#4 [mm]
  round 6.999 / inner round 4 / far side round 6.999 hole 3.2: 1(0.307,0.017)
MTHOLE3.2MM_TOPBOT7MM#5 [mm]
  round 6.999 / inner round 4 / far side round 6.999 hole 3.2: 1(0,0)
MTHOLE3.2MM_TOPBOT7MM#6 [mm]
  round 6.999 / inner round 4 / far side round 6.999 hole 3.2: 1(5.548,-0.394)
MTHOLE3.2MM_TOPBOT7MM#7 [mm]
  round 6.999 / inner round 4 / far side round 6.999 hole 3.2: 1(-3.656,0.6)
MTHOLE3.2MM_TOPBOT7MM#8 [mm]
  round 6.999 / inner round 4 / far side round 6.999 hole 3.2: 1(73.949,10.734)
MURA-BLM21-B40-CHIP-2_V1 [mm] "Chip Ferrite Bead, 2-Leads, Body 2x1.25mm, Height 1.05mm, 18um Land Pad Thickness, 3 to 4A Rated Current"
  rect 1.4x1 smd mask+0: 1(-1.3,0) 2(1.3,0)
  Top Layer region: -2.001,1.2 -0.601,1.2 -0.601,-1.2 -2.001,-1.2
  Top Layer region: 0.599,1.2 1.999,1.2 1.999,-1.2 0.599,-1.2
  body extent -1,-0.63 1,0.63, height 1.05
ONSC-SOD-523-2-502-01_V [mm] "SOD, 2-Leads, Body 1.2x0.8mm"
  rect 0.48x0.4 smd: 1(-0.66,0) 2(0.66,0)
  silkscreen extent -0.75,-0.4 0.07,0.65, body extent -0.6,-0.4 0.6,0.4, height 0.7
ONSC-SOT-323-3-419-04_V [mm] "SOT23, 3-Leads, Body 2x1.25mm, Pitch 0.65mm"
  rect 0.9x0.7 smd: 1(-0.95,0.65) 2(-0.95,-0.65) 3(0.95,0)
  silkscreen extent -1.07,-1.1 0.63,1.67, body extent -0.63,-1 0.63,1, height 1
ONSC-TO-225-3-77-09 [mm] "FM, 3-Leads, Body 7.8x3mm, Pitch 2.29mm"
  rect 1.6x1.6 hole 1: 1(0,2.29)
  round 1.6 hole 1: 2(0,0) 3(0,-2.29)
  silkscreen extent -1.49,-3.9 1.51,4.67, body extent -1.49,-3.9 1.51,3.9, height 13.64
PCBComponent_1 [mil]
  rect 800x200 smd: 1(-460,0) 3(460,0)
  rect 1725x200 smd: 2(0,2400)
  silkscreen extent -1024,145 1024,2255
POLCON.100/VH/TM1SQS/W.300/4 [mil]
  rect 62x62 hole 42: 1(0,0)
  round 62 hole 42: 2(100,0) 3(200,0) 4(300,0)
  silkscreen extent -69,-156 362,150
POLCON.100/VH/TM1SQS/W.300/6 [mil]
  rect 62x62 hole 42: 1(0,0)
  round 62 hole 42: 2(100,0) 3(200,0) 4(300,0) 5(400,0) 6(500,0)
  silkscreen extent -69,-156 562,150
SM/C_0805 [mil]
  rect 50x50 smd: 1(0,0) 2(84,0)
  silkscreen extent -38,-38 122,38
SM/C_1206 [mil]
  rect 60x60 smd: 1(0,0) 2(130,0)
  silkscreen extent -45,-45 175,45
SM/C_1210 [mil]
  rect 64x100 smd: 1(0,0) 2(135,0)
  silkscreen extent -47,-65 180,65
SM/DO214AC_12 [mil]
  rect 100x90 smd: 1(0,0) 2(170,0)
  silkscreen extent -10,-68 175,65
SM/R_0805 [mil]
  rect 50x50 smd: 1(0,0) 2(84,0)
  silkscreen extent -38,-38 122,38
SM/R_1206 [mil]
  rect 60x60 smd: 1(0,0) 2(130,0)
  silkscreen extent -45,-45 175,45
SM/R_1210 [mil]
  rect 64x100 smd: 1(0,0) 2(135,0)
  silkscreen extent -47,-65 180,65
SMA-Grotere-Gaten [mm]
  round 1.905 hole 1.372: 1(0,0)
  round 2.2 hole 1.6: 2(2.54,-2.54) 3(2.54,2.54) 4(-2.54,2.54) 5(-2.54,-2.54)
  silkscreen extent -3.17,-3.17 3.17,3.17
SMD/C_1111 [mm] "Chip Capacitor, 2-Leads, Body 2,98x2,79mm, IPC Medium Density"
  rect 1.55x3.55 smd: 1(-1.45,0) 2(1.45,0)
  silkscreen extent -0.3,-1.68 0.3,1.68, body extent -1.84,-1.78 1.84,1.78, height 2.59
SMD/R_2512 [mm] "Chip Resistor, 2-Leads, Body 6,40x3,20mm, IPC Medium Density"
  rect 1.35x3.4 smd: 1(-2.975,0) 2(2.975,0)
  silkscreen extent -1.9,-1.6 1.9,1.6, body extent -3.3,-1.7 3.3,1.7, height 0.7
SO8_N [mm] "SOIC, 8-Leads, Body 4.9x3.9mm, Pitch 1.27mm, IPC Medium Density"
  oval 2.2x0.6 smd: 1(-2.4,1.905) 2(-2.4,0.635) 3(-2.4,-0.635) 4(-2.4,-1.905) 5(2.4,-1.905) 6(2.4,-0.635) 7(2.4,0.635) 8(2.4,1.905)
  silkscreen extent -2.52,-2.5 0.9,2.88, body extent -1.95,-2.45 1.95,2.45, height 1.76
VRES38 [mil]
  rect 49x49 hole 28: 1(0,0)
  round 49 hole 28: 2(100,-100) 3(200,0)
  silkscreen extent -38,-150 238,50

## Part data
C1 C2 C3 C4 C5 C6 C7 C8 C9 C10 C11 C12 C13 C14 C15 C16 C17 C18 C19 C20 C21 C22 C23 C24 C25 C26 C27 C28 C29 C30 C31 C32 C33 C34 C35 C36 C37 C38 C39 C40 C41 C42 C43 C44 C45 C46 C47 C48 C49 C50 C51 C52 C53 C54 C55 C56 C57 C58 C59 C60 C61 C62 C63 C64 C65 C66 C67 C126 C140 C141 C142 C143 C144: "Capacitor"
CT1 J1 J3 TR1: library part Component_1
D1 D8 D10: library part CMP-1055-00490-1, "Schottky Barrier Diode, 2-Pin SOD-523, Pb-Free, Tape and Reel"
D2 D4 D5 D6 D7 D9: library part CMP-1054-00187-1, "Dual Series Switching Diodes, 3-Pin SOT-323, Pb-Free, Tape and Reel"
D3: library part CMP-0914-00001-1, "Fast Switching Diode, 75 V, 150 mA, 2-Pin 2.7 x 1.6 x 1.25 mm SMD, Tape and Reel"
FB1 FB2 FB3: library part CMP-0686-00617-2, "Chip Ferrite Bead for Power Lines, 30 Ohm, 4000 mA, -55 to 125 degC, 2 x 1.25 x 1.05 mm SMD, Bulk"
J2 J4: library part CMP-0168-00003-1, "SMA Female PCB Mount Connector - Extended"
J5: library part CMP-2000-05627-1, "Jack BNC Connector, 1 Position, Height 16.26 mm, Tail Length 6.35 mm, -55 to 85 degC, RoHS, Tube"
MH1 MH2 MH3 MH4 MH5 MH6 MH7 MH8 MH9 MH10 MH11 MH12: library part CMP-0001-00114-1, "Mounting Hole, Embedded System Module, 3.2mm pad, 2.7mm plated hole, Top / Bottom copper regions"
P1: library part CMP-1681-00007-2, "Male Header, Pitch 2.54 mm, 1 x 6 Position, Height 8.38 mm, Tail Length 2.54 mm, -55 to 125 degC, RoHS, Bulk"
P2 P3 P4: library part CMP-1755-00007-1, "Male Header, Pitch 2.5 mm, 1 x 4 Position, Height 6.1 mm, Tail Length 3.4 mm, -25 to 85 degC, RoHS, Bulk"
P5: library part CMP-0815-00001-1, "Pin Header, Pitch 2.54 mm, 1 x 2 Positions, Straight, Mated Height 6.5 mm, Surface Mount, -40 to 105 degC, RoHS, Tape and Reel"
Q1 Q3 Q4 Q6 Q7 Q8: library part CMP-1048-01269-1, "Plastic Medium-Power Silicon NPN Transistor, 3-Pin TO-225, Pb-Free, Bulk Box"
Q2: library part CMP-1258-00121-1, "P-Channel Enhancement Mode MOS Transistor, -30 V, -0.47 A, -55 to 150 degC, 3-Pin SOT23, Tape and Reel"
Q5: library part ZXMC3A16DN8, "Complementary 30V Enhancement Mode MOSFET"
Q9 Q10: library part CMP-1048-00039-1, "Plastic Medium-Power Silicon PNP Transistor, 3-Pin TO-225, Bulk Box"
Q11 Q12 Q13 Q14 Q15 Q16: library part CMP-2000-04935-1, "Digital FET, N-Channel, 0.35 W, 25 V, -55 to 150 degC, 3-Pin SOT23, RoHS, Tape and Reel"
R1 R2 R3 R4 R5 R6 R7 R8 R9 R10 R11 R12 R13 R14 R15 R16 R17 R18 R19 R20 R21 R22 R23 R24 R25 R26 R27 R28 R29 R30 R31 R32 R33 R34 R35 R36 R37 R38 R39 R40 R41 R42 R43 R44 R45 R46 R47 R48 R49 R50 R51 R52 R53 R54 R55 R56 R57 R58 R59 R60 R61 R62 R63 R64 R65 R66 R67 R68 R69 R70 R71 R72 R73 R74 R75 R76 R77 R78 R79 R80 R81 R82 R83 R84 R85 R86 R87 R88 R89 R90 R91 R92 R93 R94 R95 R96 R97: "Resistor"
U1: library part CMP-0384-00604-1, "Double Channel Low Power Operational Amplifier, 160 MHz BW, 1.6 KV/us SR, Industrial, 8-pin SOIC (R-8), Reel"
U2: library part CMP-0384-00646-1, "Single Channel Low Power Operational Amplifier, 490 MHz BW, 120 V/us SR, Industrial, 8-pin SOIC (R-8), Tube"
U3 U5: library part CMP-0806-00060-3, "Quadruple 2-Input Positive-NOR Gates, D0014A, TUBE"
U4: library part CMP-1627-00035-3, "Quadruple Positive-NAND Gates With Schmitt-Trigger Inputs, D0014A, TUBE"
U6: library part CMP-0384-00785-2, "Double Channel Rail-to-Rail Operational Amplifier, 1.9 MHz BW, 3 V/us SR, Industrial, 8-pin SOIC (R-8), Tube"
U7: library part CMP-0384-00651-1, "Single Channel Rail-to-Rail Operational Amplifier, 1.9 MHz BW, 3 V/us SR, Industrial, 8-pin SOIC (R-8), Reel"
U8: library part CMP-0074-00570-3, "Precision Micropower Shunt Voltage Reference, 3-pin SOT-23"
VR1 VR2: library part CMP-0975-00007-1, "Trimming Potentiometer, 10K Ohm +/- 10%, -55 to 125 degC, 3-Pin 19.05 x 4.83 x 6.6 mm THD, Transparent Housing, RoHS"
XF1: library part CMP-2000-05598-1, "Fuse Holder, 125 V, 10 A, -55 to 125 degC, 2-Pin SMD, RoHS, Tape and Reel"

## Via types
v1: diameter 1.27, hole 0.711, Top Layer to Bottom Layer, 85 vias
v2: diameter 0.8, hole 0.4, Top Layer to Bottom Layer, 16 vias

## Nets (pads, with @x,y where several pads share a name; then routed paths per layer and width w, separated by ;. In a path a pad name is that pad's centre, name@x,y a point inside that pad or via, vN(x,y) a via of type N, cw(c..) or ccw(c..) an arc to the next point about the centre after c; other vN are vias at no path point)
BIAS1: C32.1 R15.1 U1.3 | length 7.5
  Top Layer w0.5: R15.1@26.5,91.636 26.5,89.641 C32.1@26.829,89.312 27.363,89.312 27.925,88.75 29.5,88.75 30.115,89.365 U1.3@30.115,90.6
BIAS2: C33.1 R18.1 U1.5 | length 8.5
  Top Layer w0.5: R18.1@22.688,83.434 24.755,85.5 26,85.5 26.829,86.329 C33.1@26.829,87 27.745,87 U1.5@28.845,85.9
DCok: Q12.1 R97.2 U4.1 U7.6 | length 78.8
  Top Layer w0.5: U4.1@13.675,40.41 18.615,45.35 27.275,45.35 33.15,39.475 v1(33.15,39.425) ; v1(38.65,4.7) 38.65,12.35 43.4,17.1 v2(46.5,17.1)
  Bottom Layer w0.5: v1@33.2,39.425 36.5,36.125 36.5,25.75 39.75,22.5 42.575,22.5 44.134,20.941 R97.2@44.134,20.6 45.6,20.6 46.7,19.5 46.7,17.3 46.535,17.135 U7.6@45.15,17.135 ; Q12.1@37.325,-0.275 37.325,3.375 v1@38.625,4.675
DRAIN1: C17.2 C143.2 R26.2 TR1.1 | length 22.6
  Top Layer w1: R26.2@71.388,116 C143.2@73.35,116 ; R26.2@71.45,116 71.325,115.875 71.325,100.506 TR1.1@72.136,99.695 ; C143.2@73.4,116.05 77.2,116.05 C17.2@77.3,116.15
DRAIN2: C16.2 C144.2 R24.2 TR1.3 | length 24.7
  Top Layer w1: TR1.3@72.4,76.063 R24.2@72.4,61 72.4,55.95 72,55.55 C144.2@75.65,55.55
  Top Layer w2: TR1.3@72.136,76.327 TR1.3@72.4,76.063
ENABLE: Q4.3 R25.2 R61.2 R63.2 R64.2 R69.2 R72.2 R75.2 U2.8 | length 194.4
  Top Layer w0.3: R69.2@21.1,7.7 23.234,5.566 R61.2@23.234,5.2 ; R69.2@21.1,8.066 23.167,10.133 R63.2@23.234,10.2 21.133,12.301 R64.2@21.133,12.512 21.133,13.383 22.25,14.5 v2(30.75,14.5)
  Top Layer w0.5: U2.8@12.7,89.405 12.75,89.455 12.75,90.5 13.5,91.25 v1(13.75,91.25) ; R69.2@21.1,7.7 R69.2@21.1,8.066 ; R63.2@23.1,10.2 23.167,10.133 R63.2@23.2,10.1 ; v2(30.75,14.5) 34.609,14.5 35.554,13.554 ; R25.2@41.7,18.896 40.896,18.896 35.554,13.554 ; Q4.3@86.725,-1.26 86.725,-6.475 84.4,-8.8 48.55,-8.8 35.634,4.116 R72.2@35.634,6.5 35.325,6.5 35.25,6.575 35.25,9.796 R75.2@35.554,10.1 35.554,13.554
  Bottom Layer w0.5: v1(13.75,91.25) 15.5,89.5 15.5,59.9 30.975,44.425 30.975,22.075 32.075,20.975 32.075,17.525 30.75,16.2 v2(30.75,14.5)
GATE1: C20.1 C21.1 R29.2 R34.2 R40.2 R43.2 | length 15.8
  Top Layer w0.5: R43.2@47.092,94.107 48.107,94.107 48.25,94.25 48.25,97.318 48.159,97.409 ; R40.2@47.092,97.409 48.159,97.409 ; R34.2@47.092,100.711 48.289,100.711 48.5,100.5 48.5,97.75 48.159,97.409
  Top Layer w1: C20.1@45.438,107 C21.1@47.75,107 47.75,104.671 R29.2@47.092,104.013
GATE2: C19.1 C22.1 R30.2 R37.2 R41.2 R44.2 | length 15.4
  Top Layer w1: C19.1@45,70.25 C22.1@47.75,70.25 47.75,72.384 R44.2@47.134,73 ; R30.2@47.092,82.042 48.708,82.042 49,81.75 49,79.75 48.25,79 R37.2@47.134,79 ; R41.2@47.134,76 48.25,76 48.5,75.75 48.5,73.75